# EAGLE board relay (EAGLE 9.6.2)
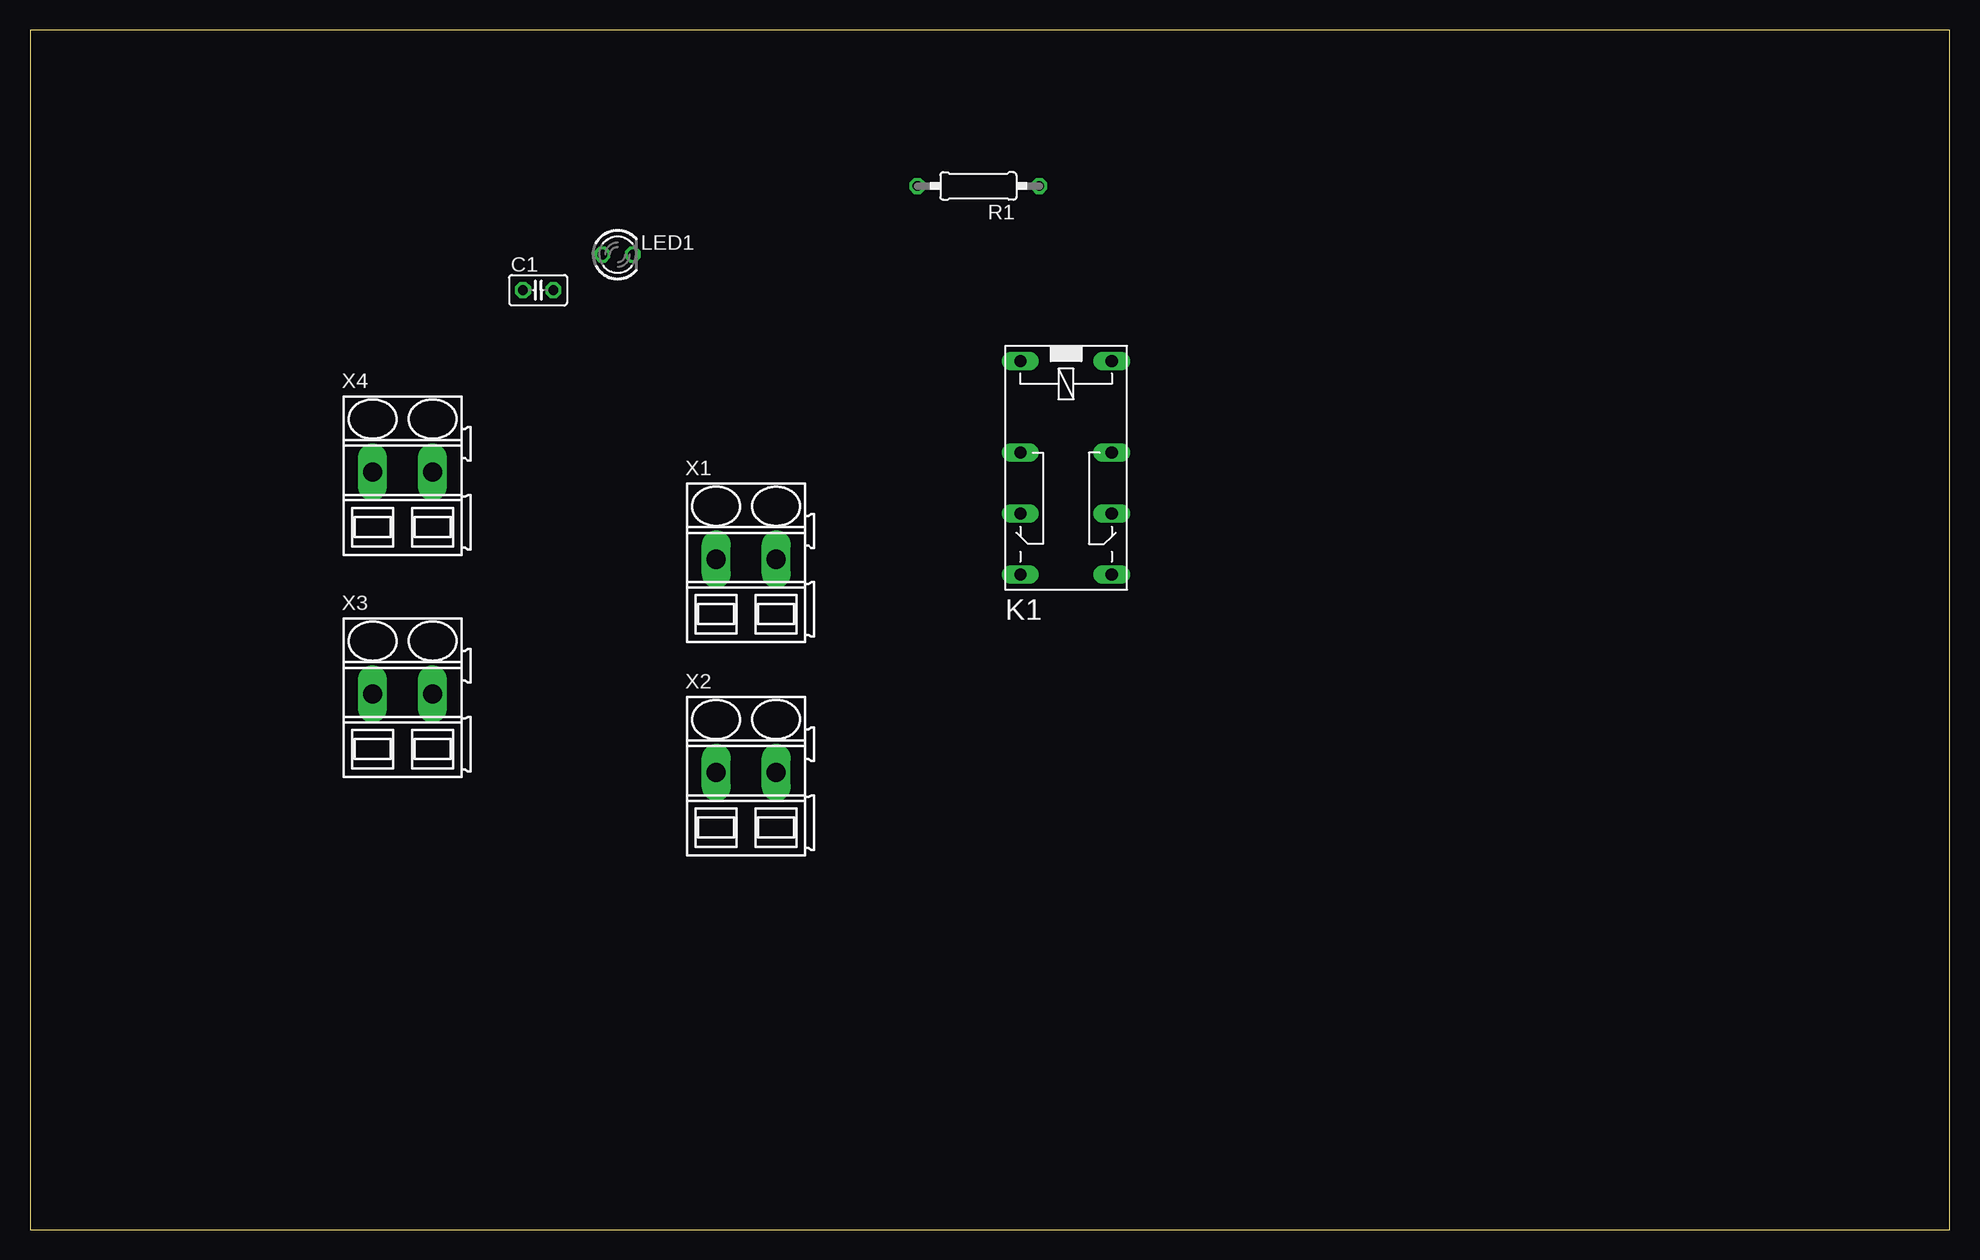
[diagram p0: board, top side]
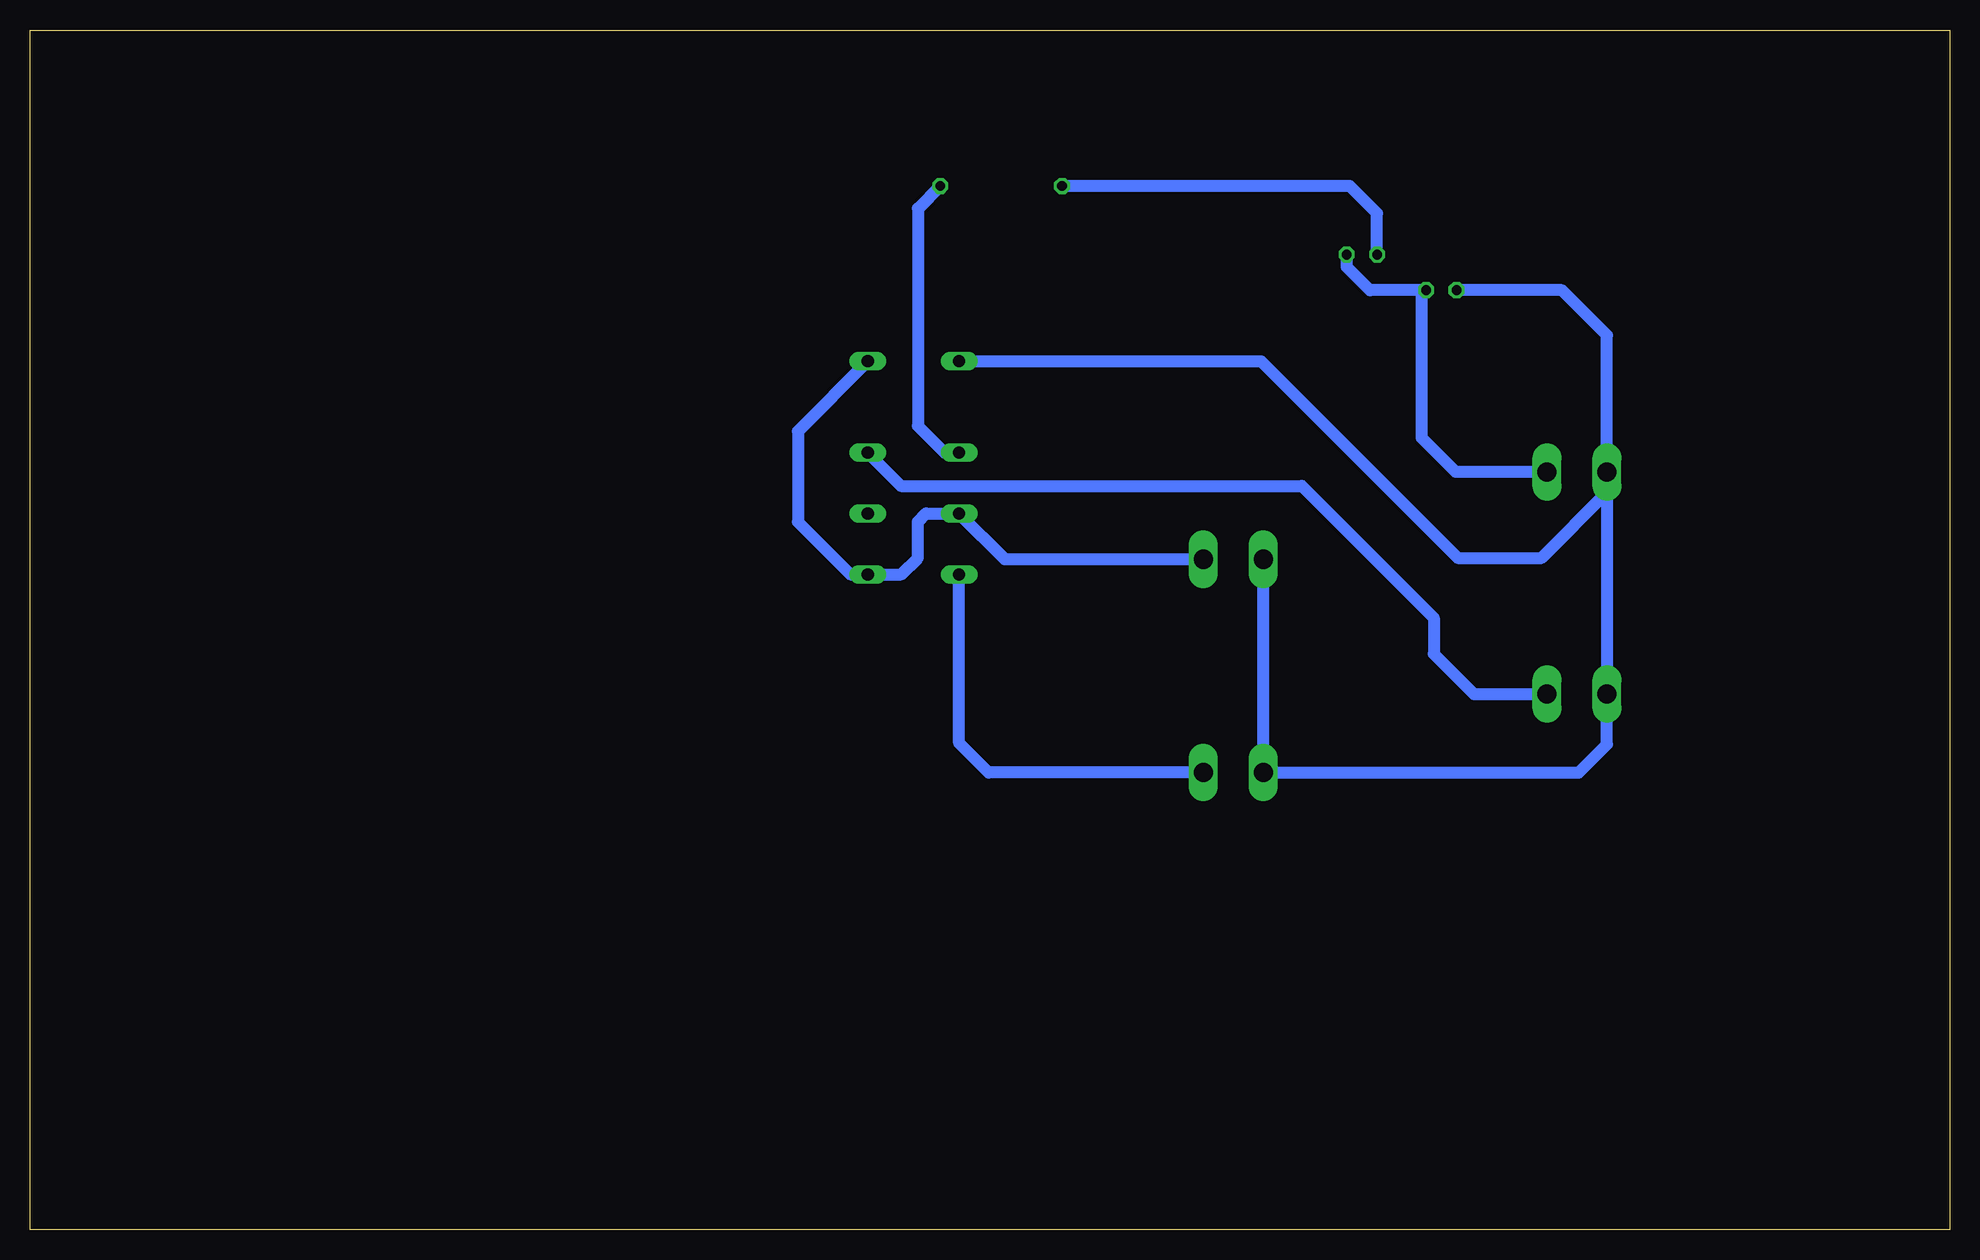
[diagram p1: board, bottom side, seen from below]

Size 160 x 100 mm. Coordinates in mm from the lower left corner, seen from the top.
Outline: 0,0 160,0 160,100 0,100 0,0
Copper layers (1*16): Top 0.035mm / dielectric 1.5mm / Bottom 0.035mm
Design rules "default": minimum track width 6mil, minimum drill 0.35mm, track to track 6mil, track to pad 6mil, pad to pad 6mil, via to via 6mil, smd to smd 6mil, copper to edge 40mil, drill to drill 6mil, minimum pad ring 10mil, minimum via ring 8mil, stop-mask expansion 4mil, vias tented up to drill 0mil, thermal gap 10mil

## Footprints (pad centres in the part's own frame; a part is rotated, then mirrored left to right if it is on the bottom)
C025-025X050 = drill 0.813 octagon: 1 -1.27,0; 2 1.27,0
351 = drill 1.016 long: 1 -3.81,-3.81; 16 -3.81,3.81; O1 8.89,-3.81; O2 8.89,3.81; P1 3.81,-3.81; P2 3.81,3.81; S1 13.97,-3.81; S2 13.97,3.81
LED3MM = drill 0.813 octagon: A -1.27,0; K 1.27,0
0207/10 = drill 0.813 octagon: 1 -5.08,0; 2 5.08,0
SMKDSP_1,5/2 = drill 1.6 pad 1.8 long: 1 -2.5,0; 2 2.5,0

## Placement (x,y rotation side)
C1  [C025-025X050]  42.36,78.31 0 top
K1  351  [351]  86.36,68.58 270 top
LED1  [LED3MM]  48.98,81.28 0 top
R1  [0207/10]  79.05,86.99 180 top
X1  SMKDSP_1,5/2  [SMKDSP_1,5/2]  59.69,55.88 0 top
X2  SMKDSP_1,5/2  [SMKDSP_1,5/2]  59.69,38.1 0 top
X3  SMKDSP_1,5/2  [SMKDSP_1,5/2]  31.06,44.64 0 top
X4  SMKDSP_1,5/2  [SMKDSP_1,5/2]  31.06,63.15 0 top

## Library data of the parts
C1 = rcl; SPICEPREFIX: C
K1 = relay; OC_FARNELL: unknown; OC_NEWARK: unknown
LED1 = led
R1 = rcl; SPICEPREFIX: R
X1-X4 = con-phoenix-smkdsp; MF: FARNELL; MPN: 1733570; OC_FARNELL: 3041244; OC_NEWARK: 69C8588

## Nets
GND: C1.1 K1.1 X1.1 X2.1 X3.1 X4.1
N$1: K1.P1 R1.1
N$2: LED1.A R1.2
O1: K1.S1 X2.2
P2: K1.P2 X3.2
S12: K1.16 K1.O1 K1.S2 X1.2
VOUT: C1.2 LED1.K X4.2

## Tracks (layer width: path | path; a pad name or v marks a point on that pad's centre or on a via)
GND
  Bottom 1.016: X4.1 X3.1 28.56,40.44 30.9,38.1 X2.1 X1.1 | X4.1 28.56,74.56 32.31,78.31 C1.1 | K1.1 57.39,72.39 41,56 34,56 28.56,61.44 X4.1
N$1
  Bottom 1.016: R1.1 86,85.12 86,67 83.77,64.77 K1.P1
N$2
  Bottom 1.016: LED1.A 47.71,84.71 49.99,86.99 R1.2
O1
  Bottom 1.016: X2.2 80.1,38.1 82.55,40.55 K1.S1
P2
  Bottom 1.016: K1.P2 87.4,62 54,62 43,51 43,48 39.64,44.64 X3.2
S12
  Bottom 1.016: X1.2 78.74,55.88 K1.O1 85.31,59.69 86,59 86,56 87.39,54.61 90,54.61 K1.S2 91.61,54.61 96,59 96,66.56 K1.16
VOUT
  Bottom 1.016: X4.2 41.15,63.15 44,66 44,77.94 C1.2 48.31,78.31 50.25,80.25 LED1.K